# EAGLE board Sprite-Panelized (EAGLE 6.1)
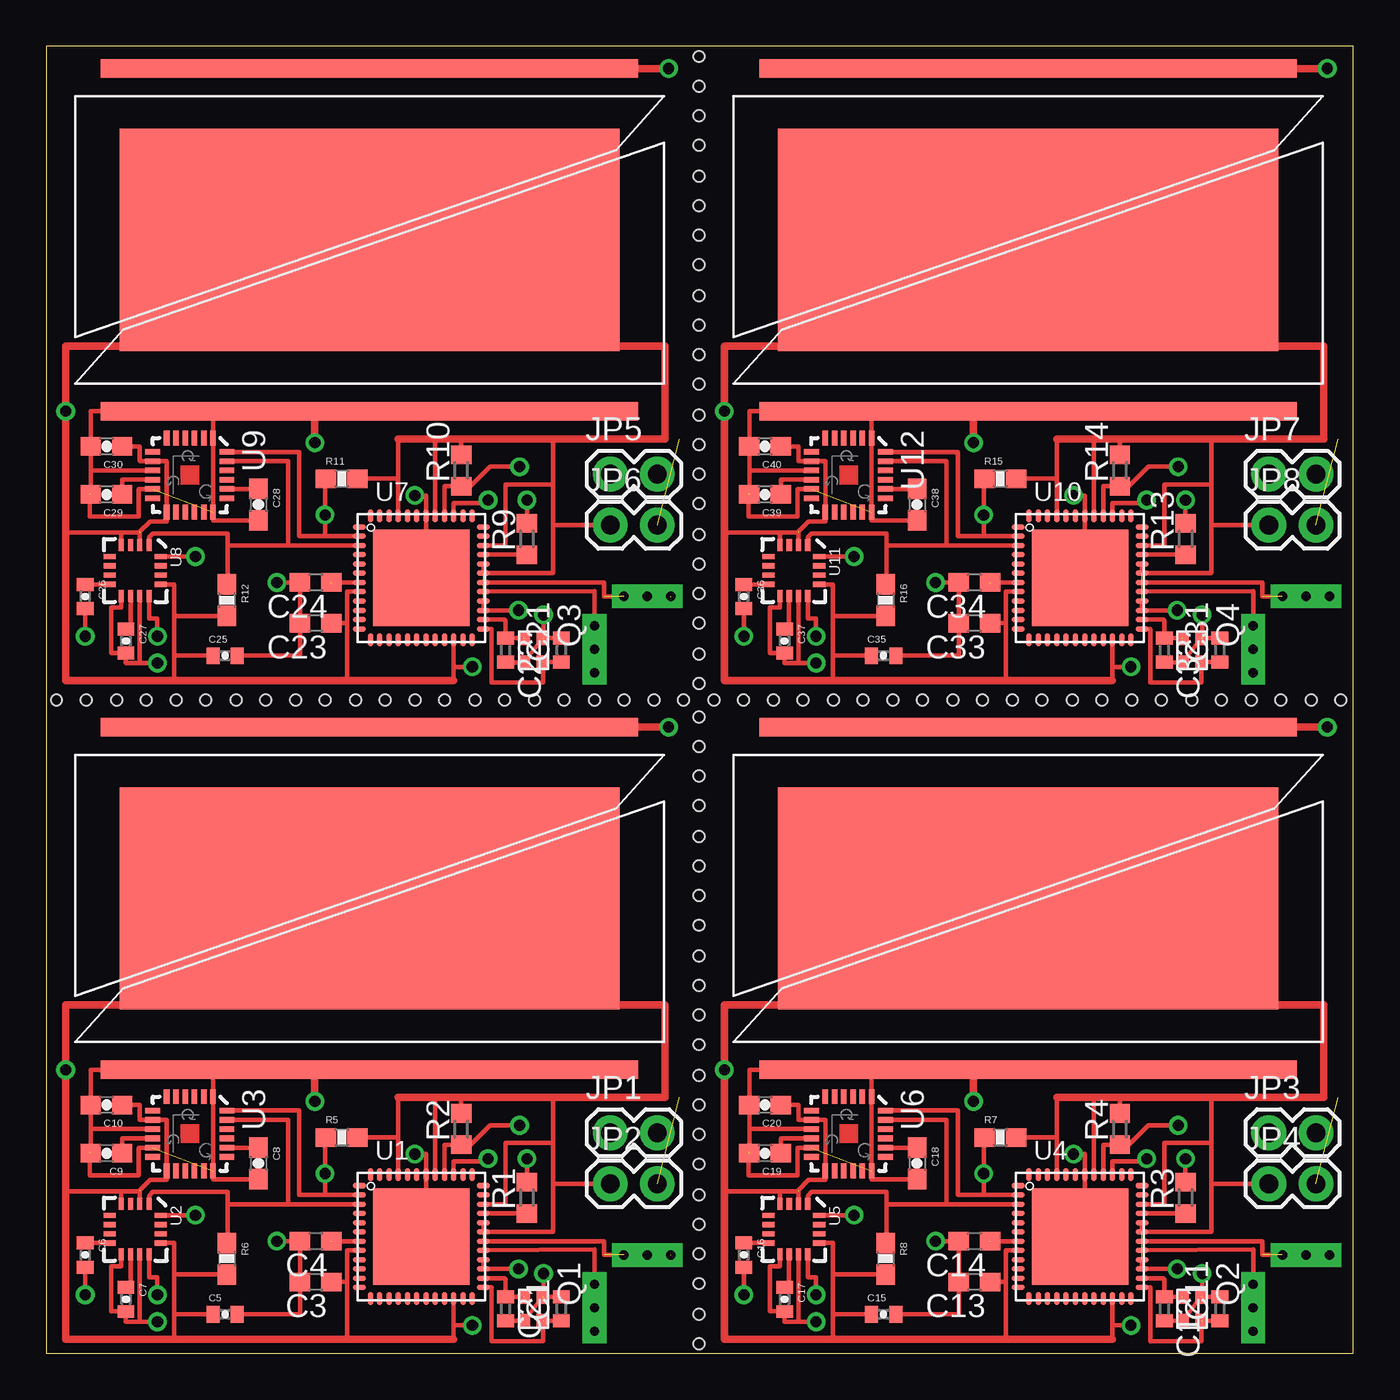
[diagram p0: board, top side]
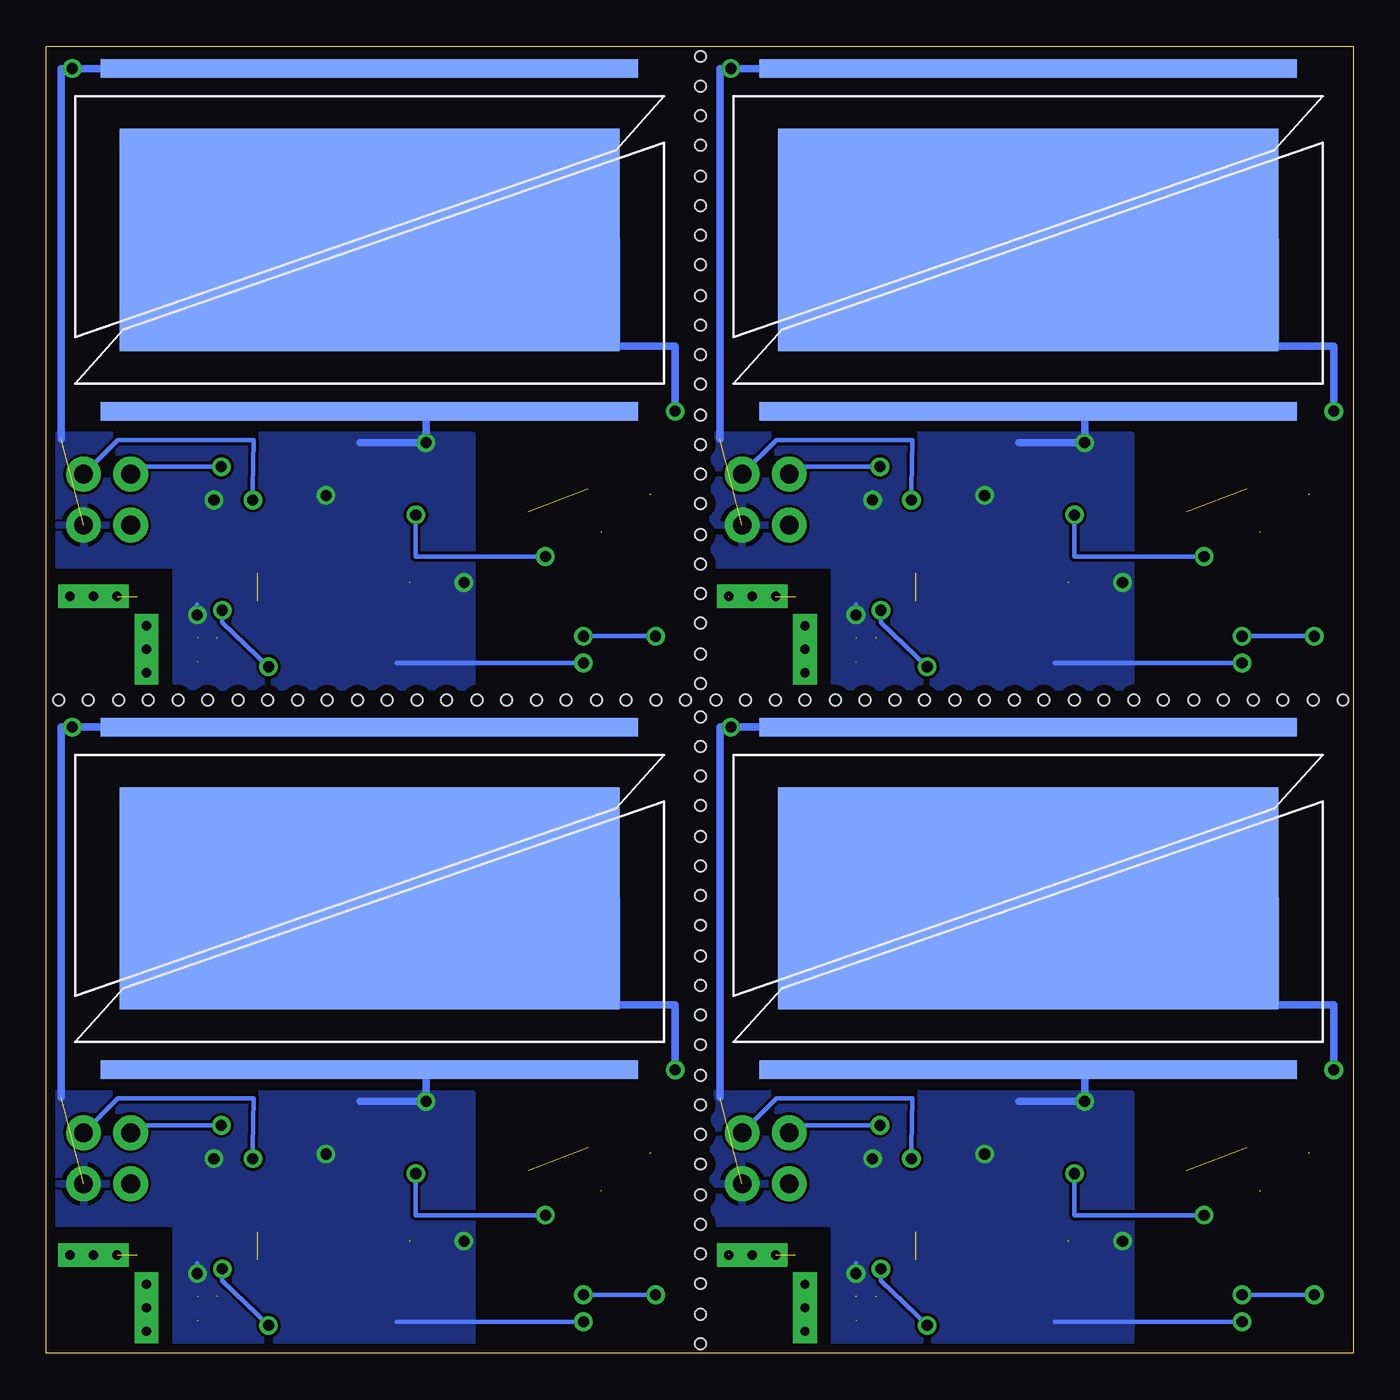
[diagram p1: board, bottom side, seen from below]

Size 70.56 x 70.56 mm. Coordinates in mm from the lower left corner, seen from the top.
Outline: 0,0 70.56,0 70.56,70.56 0,70.56 0,0
Copper layers (1*16): Top 0.0178mm / dielectric 59mil / Bottom 0.0178mm
Design rules: minimum track width 6mil, minimum drill 14mil, track to track 6mil, track to pad 6mil, pad to pad 6mil, via to via 6mil, smd to smd 6mil, copper to edge 20mil, drill to drill 16mil, minimum pad ring 8mil, minimum via ring 8mil, stop-mask expansion 3mil, vias tented up to drill 0mil, thermal gap 10mil
Holes 0.6 mm at 0.55,35.26 2.15,35.26 3.8,35.26 5.4,35.26 7,35.26 8.6,35.26 10.25,35.26 11.85,35.26 13.45,35.26 15.05,35.26 16.7,35.26 18.3,35.26 19.9,35.26 21.5,35.26 23.15,35.26 24.75,35.26 26.35,35.26 27.95,35.26 29.6,35.26 31.2,35.26 32.8,35.26 34.4,35.26 36.05,35.26 37.65,35.26 39.25,35.26 40.85,35.26 42.5,35.26 44.1,35.26 45.7,35.26 47.3,35.26 48.95,35.26 50.55,35.26 52.15,35.26 53.75,35.26 55.4,35.26 57,35.26 58.6,35.26 60.2,35.26 61.85,35.26 63.45,35.26 65.05,35.26 66.65,35.26 68.3,35.26 69.9,35.26 35.25,36.16 35.25,37.76 35.25,39.41 35.25,41.01 35.25,42.61 35.25,44.21 35.25,45.86 35.25,47.46 35.25,49.06 35.25,50.66 35.25,52.31 35.25,53.91 35.25,55.51 35.25,57.11 35.25,58.76 35.25,60.36 35.25,61.96 35.25,63.56 35.25,65.21 35.25,66.81 35.25,68.41 35.25,70.01 35.25,0.51 35.25,2.11 35.25,3.76 35.25,5.36 35.25,6.96 35.25,8.56 35.25,10.21 35.25,11.81 35.25,13.41 35.25,15.01 35.25,16.66 35.25,18.26 35.25,19.86 35.25,21.46 35.25,23.11 35.25,24.71 35.25,26.31 35.25,27.91 35.25,29.56 35.25,31.16 35.25,32.76 35.25,34.36

## Footprints (pad centres in the part's own frame; a part is rotated, then mirrored left to right if it is on the bottom)
C0402 = smd 0.7 x 0.9: 1 -0.65,0; 2 0.65,0
C0603 = smd 1.1 x 1: 1 -0.85,0; 2 0.85,0
0402-CAP = smd 0.7 x 0.9: 1 -0.65,0; 2 0.65,0
0603-CAP = smd 1.1 x 1: 1 -0.85,0; 2 0.85,0
1X02 = drill 1.016 pad 1.88: 1 0,0; 2 2.54,0
ABM11_CERAMIC-SMD-CRYSTAL = smd 0.762 x 0.66: P$1 0.66,0.508; P$2 0.66,-0.508; P$3 -0.66,-0.508; P$4 -0.66,0.508
R0603 = smd 1 x 1.1: 1 -0.85,0; 2 0.85,0
0603-RES = smd 1.1 x 1: 1 -0.85,0; 2 0.85,0
TASC = smd 29 x 1: MINUS1 15.9,17; MINUS2 15.9,-1.5 | smd 27 x 12: PLUS 15.9,7.75
RGZ48 = smd 0.7 x 0.3: 1 -3.35,2.75; 2 -3.35,2.25; 3 -3.35,1.75; 4 -3.35,1.25; 5 -3.35,0.75; 6 -3.35,0.25; 7 -3.35,-0.25; 8 -3.35,-0.75; 9 -3.35,-1.25; 10 -3.35,-1.75; 11 -3.35,-2.25; 12 -3.35,-2.75; 25 3.35,-2.75; 26 3.35,-2.25; 27 3.35,-1.75; 28 3.35,-1.25; 29 3.35,-0.75; 30 3.35,-0.25; 31 3.35,0.25; 32 3.35,0.75; 33 3.35,1.25; 34 3.35,1.75; 35 3.35,2.25; 36 3.35,2.75 | smd 0.3 x 0.7: 13 -2.75,-3.35; 14 -2.25,-3.35; 15 -1.75,-3.35; 16 -1.25,-3.35; 17 -0.75,-3.35; 18 -0.25,-3.35; 19 0.25,-3.35; 20 0.75,-3.35; 21 1.25,-3.35; 22 1.75,-3.35; 23 2.25,-3.35; 24 2.75,-3.35; 37 2.75,3.35; 38 2.25,3.35; 39 1.75,3.35; 40 1.25,3.35; 41 0.75,3.35; 42 0.25,3.35; 43 -0.25,3.35; 44 -0.75,3.35; 45 -1.25,3.35; 46 -1.75,3.35; 47 -2.25,3.35; 48 -2.75,3.35 | smd 5.2 x 5.2: TP 0,0
16LPCC = smd 0.65 x 0.28: 1 -1.37,0.75; 2 -1.37,0.25; 3 -1.37,-0.25; 4 -1.37,-0.75; 9 1.37,-0.75; 10 1.37,-0.25; 11 1.37,0.25; 12 1.37,0.75 | smd 0.28 x 0.65: 5 -0.75,-1.37; 6 -0.25,-1.37; 7 0.25,-1.37; 8 0.75,-1.37; 13 0.75,1.37; 14 0.25,1.37; 15 -0.25,1.37; 16 -0.75,1.37
QFN-24 = smd 0.8 x 0.3: 1 -2,1.25; 2 -2,0.75; 3 -2,0.25; 4 -2,-0.25; 5 -2,-0.75; 6 -2,-1.25; 13 2,-1.25; 14 2,-0.75; 15 2,-0.25; 16 2,0.25; 17 2,0.75; 18 2,1.25 | smd 0.3 x 0.8: 7 -1.25,-2; 8 -0.75,-2; 9 -0.25,-2; 10 0.25,-2; 11 0.75,-2; 12 1.25,-2; 19 1.25,2; 20 0.75,2; 21 0.25,2; 22 -0.25,2; 23 -0.75,2; 24 -1.25,2
ANTENNA = drill 0.5 pad 1.27 square: IN1 1.27,0; IN2 0,0; IN3 -1.27,0

## Placement (x,y rotation side)
C1  27 pF  [C0402]  27.8,2.4 90 top
C2  27 pF  [C0402]  24.8,2.4 270 top
C3  470 nF  [C0603]  14.55,3.85 180 top
C4  470 nF  [C0603]  14.55,6.05 180 top
C5  .1uF  [0402-CAP]  9.65,2.1 0 top
C6  .22uF  [0402-CAP]  2.1,5.3 270 top
C7  4.7uF  [0402-CAP]  4.3,2.9 270 top
C8  2.2nF  [0603-CAP]  11.45,10.25 270 top
C9  0.1uF  [0603-CAP]  3.25,10.8 180 top
C10  10nF  [0603-CAP]  3.25,13.4 180 top
C11  27 pF  [C0402]  63.36,2.4 90 top
C12  27 pF  [C0402]  60.36,2.4 270 top
C13  470 nF  [C0603]  50.11,3.85 180 top
C14  470 nF  [C0603]  50.11,6.05 180 top
C15  .1uF  [0402-CAP]  45.21,2.1 0 top
C16  .22uF  [0402-CAP]  37.66,5.3 270 top
C17  4.7uF  [0402-CAP]  39.86,2.9 270 top
C18  2.2nF  [0603-CAP]  47.01,10.25 270 top
C19  0.1uF  [0603-CAP]  38.81,10.8 180 top
C20  10nF  [0603-CAP]  38.81,13.4 180 top
C21  27 pF  [C0402]  27.8,37.96 90 top
C22  27 pF  [C0402]  24.8,37.96 270 top
C23  470 nF  [C0603]  14.55,39.41 180 top
C24  470 nF  [C0603]  14.55,41.61 180 top
C25  .1uF  [0402-CAP]  9.65,37.66 0 top
C26  .22uF  [0402-CAP]  2.1,40.86 270 top
C27  4.7uF  [0402-CAP]  4.3,38.46 270 top
C28  2.2nF  [0603-CAP]  11.45,45.81 270 top
C29  0.1uF  [0603-CAP]  3.25,46.36 180 top
C30  10nF  [0603-CAP]  3.25,48.96 180 top
C31  27 pF  [C0402]  63.36,37.96 90 top
C32  27 pF  [C0402]  60.36,37.96 270 top
C33  470 nF  [C0603]  50.11,39.41 180 top
C34  470 nF  [C0603]  50.11,41.61 180 top
C35  .1uF  [0402-CAP]  45.21,37.66 0 top
C36  .22uF  [0402-CAP]  37.66,40.86 270 top
C37  4.7uF  [0402-CAP]  39.86,38.46 270 top
C38  2.2nF  [0603-CAP]  47.01,45.81 270 top
C39  0.1uF  [0603-CAP]  38.81,46.36 180 top
C40  10nF  [0603-CAP]  38.81,48.96 180 top
JP1  [1X02]  30.45,11.9 0 top
JP2  [1X02]  30.45,9.15 0 top
JP3  [1X02]  66.01,11.9 0 top
JP4  [1X02]  66.01,9.15 0 top
JP5  [1X02]  30.45,47.46 0 top
JP6  [1X02]  30.45,44.71 0 top
JP7  [1X02]  66.01,47.46 0 top
JP8  [1X02]  66.01,44.71 0 top
Q1  ABM11  [ABM11_CERAMIC-SMD-CRYSTAL]  26.3,2.4 270 top
Q2  ABM11  [ABM11_CERAMIC-SMD-CRYSTAL]  61.86,2.4 270 top
Q3  ABM11  [ABM11_CERAMIC-SMD-CRYSTAL]  26.3,37.96 270 top
Q4  ABM11  [ABM11_CERAMIC-SMD-CRYSTAL]  61.86,37.96 270 top
R1  56 K  [R0603]  25.95,8.4 90 top
R2  47 K  [R0603]  22.4,12.1 90 top
R3  56 K  [R0603]  61.51,8.4 90 top
R4  47 K  [R0603]  57.96,12.1 90 top
R5  DNP  [0603-RES]  15.95,11.65 0 top
R6  DNP  [0603-RES]  9.75,5.1 270 top
R7  DNP  [0603-RES]  51.51,11.65 0 top
R8  DNP  [0603-RES]  45.31,5.1 270 top
R9  56 K  [R0603]  25.95,43.96 90 top
R10  47 K  [R0603]  22.4,47.66 90 top
R11  DNP  [0603-RES]  15.95,47.21 0 top
R12  DNP  [0603-RES]  9.75,40.66 270 top
R13  56 K  [R0603]  61.51,43.96 90 top
R14  47 K  [R0603]  57.96,47.66 90 top
R15  DNP  [0603-RES]  51.51,47.21 0 top
R16  DNP  [0603-RES]  45.31,40.66 270 top
S1  TASC  [TASC]  1.55,16.8 0 top
S2  TASC  [TASC]  33.45,16.8 0 bottom
S3  TASC  [TASC]  37.11,16.8 0 top
S4  TASC  [TASC]  69.01,16.8 0 bottom
S5  TASC  [TASC]  1.55,52.36 0 top
S6  TASC  [TASC]  33.45,52.36 0 bottom
S7  TASC  [TASC]  37.11,52.36 0 top
S8  TASC  [TASC]  69.01,52.36 0 bottom
U1  CC430F5137  [RGZ48]  20.25,6.3 0 top
U2  HMC5883LSMD  [16LPCC]  4.8,6.7 270 top
U3  ITG-3200  [QFN-24]  7.75,11.85 270 top
U4  CC430F5137  [RGZ48]  55.81,6.3 0 top
U5  HMC5883LSMD  [16LPCC]  40.36,6.7 270 top
U6  ITG-3200  [QFN-24]  43.31,11.85 270 top
U7  CC430F5137  [RGZ48]  20.25,41.86 0 top
U8  HMC5883LSMD  [16LPCC]  4.8,42.26 270 top
U9  ITG-3200  [QFN-24]  7.75,47.41 270 top
U10  CC430F5137  [RGZ48]  55.81,41.86 0 top
U11  HMC5883LSMD  [16LPCC]  40.36,42.26 270 top
U12  ITG-3200  [QFN-24]  43.31,47.41 270 top
U$1  ANTENNA  [ANTENNA]  32.45,5.3 180 top
U$2  ANTENNA  [ANTENNA]  29.6,2.45 90 top
U$3  ANTENNA  [ANTENNA]  68.01,5.3 180 top
U$4  ANTENNA  [ANTENNA]  65.16,2.45 90 top
U$5  ANTENNA  [ANTENNA]  32.45,40.86 180 top
U$6  ANTENNA  [ANTENNA]  29.6,38.01 90 top
U$7  ANTENNA  [ANTENNA]  68.01,40.86 180 top
U$8  ANTENNA  [ANTENNA]  65.16,38.01 90 top

## Library data of the parts
C1-C4 C11-C14 C21-C24 C31-C34 R1-R4 R9 R10 R13 R14 = rcl
C5-C10 C15-C20 C25-C30 C35-C40 JP1-JP8 R5-R8 R11 R12 R15 R16 U2 U3 U5 U6 U8 U9 U11 U12 = SparkFun
Q1-Q4 = ABM11_JAA
S1-S8 = TASC
U1 U4 U7 U10 = TI_MSP430_v16
U$1-U$8 = SpriteAntenna

## Nets
GND: C1.2 C2.2 C3.2 C4.2 C5.2 C7.2 C8.2 C9.2 C10.2 JP2.2 Q1.P$2 Q1.P$4 R1.2 S1.MINUS1 S1.MINUS2 S2.MINUS1 S2.MINUS2 U1.42 U1.TP U2.9 U2.11 U3.1 U3.9 U3.11 U3.18
GND1: C11.2 C12.2 C13.2 C14.2 C15.2 C17.2 C18.2 C19.2 C20.2 JP4.2 Q2.P$2 Q2.P$4 R3.2 S3.MINUS1 S3.MINUS2 S4.MINUS1 S4.MINUS2 U4.42 U4.TP U5.9 U5.11 U6.1 U6.9 U6.11 U6.18
GND2: C21.2 C22.2 C23.2 C24.2 C25.2 C27.2 C28.2 C29.2 C30.2 JP6.2 Q3.P$2 Q3.P$4 R9.2 S5.MINUS1 S5.MINUS2 S6.MINUS1 S6.MINUS2 U7.42 U7.TP U8.9 U8.11 U9.1 U9.9 U9.11 U9.18
GND3: C31.2 C32.2 C33.2 C34.2 C35.2 C37.2 C38.2 C39.2 C40.2 JP8.2 Q4.P$2 Q4.P$4 R13.2 S7.MINUS1 S7.MINUS2 S8.MINUS1 S8.MINUS2 U10.42 U10.TP U11.9 U11.11 U12.1 U12.9 U12.11 U12.18
N$1: C2.1 Q1.P$3 U1.26
N$2: C1.1 Q1.P$1 U1.25
N$3: R1.1 U1.33
N$4: C4.1 U1.7
N$5: C6.1 U2.8
N$6: C6.2 U2.12
N$7: C7.1 U2.10
N$8: C8.1 U3.20
N$9: C9.1 U3.10
N$10: C12.1 Q2.P$3 U4.26
N$11: C11.1 Q2.P$1 U4.25
N$12: R3.1 U4.33
N$13: C14.1 U4.7
N$14: C16.1 U5.8
N$15: C16.2 U5.12
N$16: C17.1 U5.10
N$17: C18.1 U6.20
N$18: C19.1 U6.10
N$19: C22.1 Q3.P$3 U7.26
N$20: C21.1 Q3.P$1 U7.25
N$21: R9.1 U7.33
N$22: C24.1 U7.7
N$23: C26.1 U8.8
N$24: C26.2 U8.12
N$25: C27.1 U8.10
N$26: C28.1 U9.20
N$27: C29.1 U9.10
N$28: C32.1 Q4.P$3 U10.26
N$29: C31.1 Q4.P$1 U10.25
N$30: R13.1 U10.33
N$31: C34.1 U10.7
N$32: C36.1 U11.8
N$33: C36.2 U11.12
N$34: C37.1 U11.10
N$35: C38.1 U12.20
N$36: C39.1 U12.10
RFN: U1.30 U$1.IN1 U$1.IN2 U$1.IN3
RFN1: U4.30 U$3.IN1 U$3.IN2 U$3.IN3
RFN2: U7.30 U$5.IN1 U$5.IN2 U$5.IN3
RFN3: U10.30 U$7.IN1 U$7.IN2 U$7.IN3
RFP: U1.29 U$2.IN1 U$2.IN2 U$2.IN3
RFP1: U4.29 U$4.IN1 U$4.IN2 U$4.IN3
RFP2: U7.29 U$6.IN1 U$6.IN2 U$6.IN3
RFP3: U10.29 U$8.IN1 U$8.IN2 U$8.IN3
RST: JP1.1 R2.1 U1.40
RST1: JP3.1 R4.1 U4.40
RST2: JP5.1 R10.1 U7.40
RST3: JP7.1 R14.1 U10.40
SCL: R6.1 U1.3 U2.1 U3.23
SCL1: R8.1 U4.3 U5.1 U6.23
SCL2: R12.1 U7.3 U8.1 U9.23
SCL3: R16.1 U10.3 U11.1 U12.23
SDA: R5.1 U1.2 U2.16 U3.24
SDA1: R7.1 U4.2 U5.16 U6.24
SDA2: R11.1 U7.2 U8.16 U9.24
SDA3: R15.1 U10.2 U11.16 U12.24
TEST: JP1.2 U1.39
TEST1: JP3.2 U4.39
TEST2: JP5.2 U7.39
TEST3: JP7.2 U10.39
VCC: C3.1 C5.1 C10.1 JP2.1 R2.2 R5.2 R6.2 S1.PLUS S2.PLUS U1.8 U1.22 U1.27 U1.28 U1.31 U1.32 U1.34 U1.41 U1.45 U2.2 U2.4 U2.13 U3.8 U3.13
VCC1: C13.1 C15.1 C20.1 JP4.1 R4.2 R7.2 R8.2 S3.PLUS S4.PLUS U4.8 U4.22 U4.27 U4.28 U4.31 U4.32 U4.34 U4.41 U4.45 U5.2 U5.4 U5.13 U6.8 U6.13
VCC2: C23.1 C25.1 C30.1 JP6.1 R10.2 R11.2 R12.2 S5.PLUS S6.PLUS U7.8 U7.22 U7.27 U7.28 U7.31 U7.32 U7.34 U7.41 U7.45 U8.2 U8.4 U8.13 U9.8 U9.13
VCC3: C33.1 C35.1 C40.1 JP8.1 R14.2 R15.2 R16.2 S7.PLUS S8.PLUS U10.8 U10.22 U10.27 U10.28 U10.31 U10.32 U10.34 U10.41 U10.45 U11.2 U11.4 U11.13 U12.8 U12.13

## Tracks (layer width: path | path; a pad name or v marks a point on that pad's centre or on a via)
GND  (via drill 0.6)  (4 unrouted)
  Top 0.254: C2.2 25.05,1.74 Q1.P$2 Q1.P$4 C1.2 | 26.85,3.06 v26.85,4.3 | R1.2 v25.95,10.5 | U1.42 20.5,6.3 U1.TP | v12.45,6.05 C4.2 C3.2 13.7,2.1 C5.2 | U1.42 20.5,9.75 | U1.42 20.5,10.75 v19.9,10.75 | C7.2 4.3,1.7 5.05,1.7 | 5.05,1.7 v6,1.7 | U2.9 4.05,4.7 3.5,4.7 3.5,2.25 C7.2 | C7.2 4.55,2.3 | U2.11 5.05,1.7 | U3.9 2.4,12.1 | 4.3,15.25 4.3,15.3 2.4,15.3 C10.2 2.4,12.1 | 2.4,12.1 C9.2 | 14.5,15.35 9,15.3 U3.1 U3.18 9,9.4 C8.2 | U3.11 5,11.1 5,9.6 2.35,9.6 2.35,10.85
  Top 0.406: S1.MINUS1 v33.6,33.8 | S1.MINUS2 14.5,15.35 v14.5,13.6
  Bottom 0.254: v26.85,4.3 26.85,4.85 | v19.9,10.75 19.85,10.95 19.85,11.1 | v6,1.7 16.1,1.7
  Bottom 0.406: 34.2,13.8 34.2,33.8 v33.6,33.8 S2.MINUS1 | 18.05,13.6 v14.5,13.6 14.5,15.3 S2.MINUS2
  pour Bottom: 12,14 12,0 28,0 28,7 35,7 35,14
GND1  (via drill 0.6)  (4 unrouted)
  Top 0.254: C12.2 60.61,1.74 Q2.P$2 Q2.P$4 C11.2 | 62.41,3.06 v62.41,4.3 | R3.2 v61.51,10.5 | U4.42 56.06,6.3 U4.TP | v48.01,6.05 C14.2 C13.2 49.26,2.1 C15.2 | U4.42 56.06,9.75 | U4.42 56.06,10.75 v55.46,10.75 | C17.2 39.86,1.7 40.61,1.7 | 40.61,1.7 v41.56,1.7 | U5.9 39.61,4.7 39.06,4.7 39.06,2.25 C17.2 | C17.2 40.11,2.3 | U5.11 40.61,1.7 | U6.9 37.96,12.1 | 39.86,15.25 39.86,15.3 37.96,15.3 C20.2 37.96,12.1 | 37.96,12.1 C19.2 | 50.06,15.35 44.56,15.3 U6.1 U6.18 44.56,9.4 C18.2 | U6.11 40.56,11.1 40.56,9.6 37.91,9.6 37.91,10.85
  Top 0.406: S3.MINUS1 v69.16,33.8 | S3.MINUS2 50.06,15.35 v50.06,13.6
  Bottom 0.254: v62.41,4.3 62.41,4.85 | v55.46,10.75 55.41,10.95 55.41,11.1 | v41.56,1.7 51.66,1.7
  Bottom 0.406: 69.76,13.8 69.76,33.8 v69.16,33.8 S4.MINUS1 | 53.61,13.6 v50.06,13.6 50.06,15.3 S4.MINUS2
  pour Bottom: 47.56,14 47.56,0 63.56,0 63.56,7 70.56,7 70.56,14
GND2  (via drill 0.6)  (4 unrouted)
  Top 0.254: C22.2 25.05,37.3 Q3.P$2 Q3.P$4 C21.2 | 26.85,38.62 v26.85,39.86 | R9.2 v25.95,46.06 | U7.42 20.5,41.86 U7.TP | v12.45,41.61 C24.2 C23.2 13.7,37.66 C25.2 | U7.42 20.5,45.31 | U7.42 20.5,46.31 v19.9,46.31 | C27.2 4.3,37.26 5.05,37.26 | 5.05,37.26 v6,37.26 | U8.9 4.05,40.26 3.5,40.26 3.5,37.81 C27.2 | C27.2 4.55,37.86 | U8.11 5.05,37.26 | U9.9 2.4,47.66 | 4.3,50.81 4.3,50.86 2.4,50.86 C30.2 2.4,47.66 | 2.4,47.66 C29.2 | 14.5,50.91 9,50.86 U9.1 U9.18 9,44.96 C28.2 | U9.11 5,46.66 5,45.16 2.35,45.16 2.35,46.41
  Top 0.406: S5.MINUS1 v33.6,69.36 | S5.MINUS2 14.5,50.91 v14.5,49.16
  Bottom 0.254: v26.85,39.86 26.85,40.41 | v19.9,46.31 19.85,46.51 19.85,46.66 | v6,37.26 16.1,37.26
  Bottom 0.406: 34.2,49.36 34.2,69.36 v33.6,69.36 S6.MINUS1 | 18.05,49.16 v14.5,49.16 14.5,50.86 S6.MINUS2
  pour Bottom: 12,49.56 12,35.56 28,35.56 28,42.56 35,42.56 35,49.56
GND3  (via drill 0.6)  (4 unrouted)
  Top 0.254: C32.2 60.61,37.3 Q4.P$2 Q4.P$4 C31.2 | 62.41,38.62 v62.41,39.86 | R13.2 v61.51,46.06 | U10.42 56.06,41.86 U10.TP | v48.01,41.61 C34.2 C33.2 49.26,37.66 C35.2 | U10.42 56.06,45.31 | U10.42 56.06,46.31 v55.46,46.31 | C37.2 39.86,37.26 40.61,37.26 | 40.61,37.26 v41.56,37.26 | U11.9 39.61,40.26 39.06,40.26 39.06,37.81 C37.2 | C37.2 40.11,37.86 | U11.11 40.61,37.26 | U12.9 37.96,47.66 | 39.86,50.81 39.86,50.86 37.96,50.86 C40.2 37.96,47.66 | 37.96,47.66 C39.2 | 50.06,50.91 44.56,50.86 U12.1 U12.18 44.56,44.96 C38.2 | U12.11 40.56,46.66 40.56,45.16 37.91,45.16 37.91,46.41
  Top 0.406: S7.MINUS1 v69.16,69.36 | S7.MINUS2 50.06,50.91 v50.06,49.16
  Bottom 0.254: v62.41,39.86 62.41,40.41 | v55.46,46.31 55.41,46.51 55.41,46.66 | v41.56,37.26 51.66,37.26
  Bottom 0.406: 69.76,49.36 69.76,69.36 v69.16,69.36 S8.MINUS1 | 53.61,49.16 v50.06,49.16 50.06,50.86 S8.MINUS2
  pour Bottom: 47.56,49.56 47.56,35.56 63.56,35.56 63.56,42.56 70.56,42.56 70.56,49.56
N$1  (1 unrouted)
  Top 0.254: U1.26 24.75,4.05 24.8,4 C2.1 25.75,3.05
N$2  (1 unrouted)
  Top 0.254: U1.25 24.05,3.55 24.05,0.65 26.81,0.65 Q1.P$1 | C1.1 26.85,1.75
N$3
  Top 0.254: R1.1 U1.33
N$4  (1 unrouted)
  Top 0.254: U1.7 15.35,6.05 15.35,6.1
N$5
  Top 0.254: U2.8 C6.1 2.1,6
N$6  (via drill 0.6)
  Top 0.254: C6.2 v2.1,3.15 | U2.12 5.55,4.1 6,4.1 v6,3.15
  Bottom 0.254: v2.1,3.15 v6,3.15
N$7
  Top 0.254: C7.1 4.55,3.55 U2.10
N$8
  Top 0.254: U3.20 C8.1 11.65,11.25
N$9
  Top 0.254: U3.10 4.1,11.6 C9.1
N$10  (1 unrouted)
  Top 0.254: U4.26 60.31,4.05 60.36,4 C12.1 61.31,3.05
N$11  (1 unrouted)
  Top 0.254: U4.25 59.61,3.55 59.61,0.65 62.37,0.65 Q2.P$1 | C11.1 62.41,1.75
N$12
  Top 0.254: R3.1 U4.33
N$13  (1 unrouted)
  Top 0.254: U4.7 50.91,6.05 50.91,6.1
N$14
  Top 0.254: U5.8 C16.1 37.66,6
N$15  (via drill 0.6)
  Top 0.254: C16.2 v37.66,3.15 | U5.12 41.11,4.1 41.56,4.1 v41.56,3.15
  Bottom 0.254: v37.66,3.15 v41.56,3.15
N$16
  Top 0.254: C17.1 40.11,3.55 U5.10
N$17
  Top 0.254: U6.20 C18.1 47.21,11.25
N$18
  Top 0.254: U6.10 39.66,11.6 C19.1
N$19  (1 unrouted)
  Top 0.254: U7.26 24.75,39.61 24.8,39.56 C22.1 25.75,38.61
N$20  (1 unrouted)
  Top 0.254: U7.25 24.05,39.11 24.05,36.21 26.81,36.21 Q3.P$1 | C21.1 26.85,37.31
N$21
  Top 0.254: R9.1 U7.33
N$22  (1 unrouted)
  Top 0.254: U7.7 15.35,41.61 15.35,41.66
N$23
  Top 0.254: U8.8 C26.1 2.1,41.56
N$24  (via drill 0.6)
  Top 0.254: C26.2 v2.1,38.71 | U8.12 5.55,39.66 6,39.66 v6,38.71
  Bottom 0.254: v2.1,38.71 v6,38.71
N$25
  Top 0.254: C27.1 4.55,39.11 U8.10
N$26
  Top 0.254: U9.20 C28.1 11.65,46.81
N$27
  Top 0.254: U9.10 4.1,47.16 C29.1
N$28  (1 unrouted)
  Top 0.254: U10.26 60.31,39.61 60.36,39.56 C32.1 61.31,38.61
N$29  (1 unrouted)
  Top 0.254: U10.25 59.61,39.11 59.61,36.21 62.37,36.21 Q4.P$1 | C31.1 62.41,37.31
N$30
  Top 0.254: R13.1 U10.33
N$31  (1 unrouted)
  Top 0.254: U10.7 50.91,41.61 50.91,41.66
N$32
  Top 0.254: U11.8 C36.1 37.66,41.56
N$33  (via drill 0.6)
  Top 0.254: C36.2 v37.66,38.71 | U11.12 41.11,39.66 41.56,39.66 v41.56,38.71
  Bottom 0.254: v37.66,38.71 v41.56,38.71
N$34
  Top 0.254: C37.1 40.11,39.11 U11.10
N$35
  Top 0.254: U12.20 C38.1 47.21,46.81
N$36
  Top 0.254: U12.10 39.66,47.16 C39.1
RFN  (2 unrouted)
  Top 0.254: U1.30 30.1,6.05 30.1,5.3 U$1.IN2 33.7,5.3
RFN1  (2 unrouted)
  Top 0.254: U4.30 65.66,6.05 65.66,5.3 U$3.IN2 69.26,5.3
RFN2  (2 unrouted)
  Top 0.254: U7.30 30.1,41.61 30.1,40.86 U$5.IN2 33.7,40.86
RFN3  (2 unrouted)
  Top 0.254: U10.30 65.66,41.61 65.66,40.86 U$7.IN2 69.26,40.86
RFP
  Top 0.254: U1.29 29.6,5.6 U$2.IN1 U$2.IN2 U$2.IN3
RFP1
  Top 0.254: U4.29 65.16,5.6 U$4.IN1 U$4.IN2 U$4.IN3
RFP2
  Top 0.254: U7.29 29.6,41.16 U$6.IN1 U$6.IN2 U$6.IN3
RFP3
  Top 0.254: U10.29 65.16,41.16 U$8.IN1 U$8.IN2 U$8.IN3
RST  (via drill 0.6)
  Top 0.254: U1.40 21.5,11.25 R2.1 22.9,11.25 23.95,12.3 v25.55,12.3
  Bottom 0.254: v25.55,12.3 30.05,12.3 JP1.1
RST1  (via drill 0.6)
  Top 0.254: U4.40 57.06,11.25 R4.1 58.46,11.25 59.51,12.3 v61.11,12.3
  Bottom 0.254: v61.11,12.3 65.61,12.3 JP3.1
RST2  (via drill 0.6)
  Top 0.254: U7.40 21.5,46.81 R10.1 22.9,46.81 23.95,47.86 v25.55,47.86
  Bottom 0.254: v25.55,47.86 30.05,47.86 JP5.1
RST3  (via drill 0.6)
  Top 0.254: U10.40 57.06,46.81 R14.1 58.46,46.81 59.51,47.86 v61.11,47.86
  Bottom 0.254: v61.11,47.86 65.61,47.86 JP7.1
SCL
  Top 0.254: 9.8,8.05 9.8,8.7 5.75,8.7 5.55,8.5 U2.1 | 9.8,8.05 13.05,8.05 | 13.05,8.05 U1.3 | U3.23 13.05,12.6 13.05,8.05 | R6.1 9.8,5.95 9.8,8.05
SCL1
  Top 0.254: 45.36,8.05 45.36,8.7 41.31,8.7 41.11,8.5 U5.1 | 45.36,8.05 48.61,8.05 | 48.61,8.05 U4.3 | U6.23 48.61,12.6 48.61,8.05 | R8.1 45.36,5.95 45.36,8.05
SCL2
  Top 0.254: 9.8,43.61 9.8,44.26 5.75,44.26 5.55,44.06 U8.1 | 9.8,43.61 13.05,43.61 | 13.05,43.61 U7.3 | U9.23 13.05,48.16 13.05,43.61 | R12.1 9.8,41.51 9.8,43.61
SCL3
  Top 0.254: 45.36,43.61 45.36,44.26 41.31,44.26 41.11,44.06 U11.1 | 45.36,43.61 48.61,43.61 | 48.61,43.61 U10.3 | U12.23 48.61,48.16 48.61,43.61 | R16.1 45.36,41.51 45.36,43.61
SDA  (via drill 0.6)
  Top 0.254: U3.24 13.65,13.1 13.65,8.55 15.05,8.55 | 15.05,8.55 U1.2 | U2.16 v8.05,7.45 | 15.05,8.55 v15.05,9.7 15.05,11.65 R5.1
  Bottom 0.254: v8.05,7.45 15.05,7.45 v15.05,9.7
SDA1  (via drill 0.6)
  Top 0.254: U6.24 49.21,13.1 49.21,8.55 50.61,8.55 | 50.61,8.55 U4.2 | U5.16 v43.61,7.45 | 50.61,8.55 v50.61,9.7 50.61,11.65 R7.1
  Bottom 0.254: v43.61,7.45 50.61,7.45 v50.61,9.7
SDA2  (via drill 0.6)
  Top 0.254: U9.24 13.65,48.66 13.65,44.11 15.05,44.11 | 15.05,44.11 U7.2 | U8.16 v8.05,43.01 | 15.05,44.11 v15.05,45.26 15.05,47.21 R11.1
  Bottom 0.254: v8.05,43.01 15.05,43.01 v15.05,45.26
SDA3  (via drill 0.6)
  Top 0.254: U12.24 49.21,48.66 49.21,44.11 50.61,44.11 | 50.61,44.11 U10.2 | U11.16 v43.61,43.01 | 50.61,44.11 v50.61,45.26 50.61,47.21 R15.1
  Bottom 0.254: v43.61,43.01 50.61,43.01 v50.61,45.26
TEST  (via drill 0.6)
  Top 0.254: U1.39 22,10.35 23.65,10.35 v23.85,10.5
  Bottom 0.254: v23.85,10.5 23.85,11.15 23.8,13.75 31.14,13.75 JP1.2
TEST1  (via drill 0.6)
  Top 0.254: U4.39 57.56,10.35 59.21,10.35 v59.41,10.5
  Bottom 0.254: v59.41,10.5 59.41,11.15 59.36,13.75 66.7,13.75 JP3.2
TEST2  (via drill 0.6)
  Top 0.254: U7.39 22,45.91 23.65,45.91 v23.85,46.06
  Bottom 0.254: v23.85,46.06 23.85,46.71 23.8,49.31 31.14,49.31 JP5.2
TEST3  (via drill 0.6)
  Top 0.254: U10.39 57.56,45.91 59.21,45.91 v59.41,46.06
  Bottom 0.254: v59.41,46.06 59.41,46.71 59.36,49.31 66.7,49.31 JP7.2
VCC  (via drill 0.6)  (2 unrouted)
  Top 0.254: 16.9,5.6 U1.8 16.25,5.55 16.25,3.85 | 16.25,3.85 C3.1 | U1.45 19,11.65 | 19,11.65 19,13.8 | 22,0.75 22,1.5 | 22,1.5 U1.22 | U1.32 U1.31 27.35,6.55 27.35,9.15 | 27.35,9.15 27.35,11.3 | 27.35,11.3 27.35,13.8 | v23,1.5 22,1.5 | v25.5,4.55 U1.27 U1.28 | 16.25,3.85 16.25,0.75 | 1.05,6.7 1.05,6.75 | U2.4 4.05,8.75 | 4.05,8.75 5.05,8.75 U2.2 | U2.13 6.9,5.95 6.9,4.25 | 6.9,4.25 6.9,2.1 | 6.9,2.1 6.9,0.75 | 4.05,8.75 1.05,8.75 | JP2.1 27.35,9.15 | C5.1 6.9,2.1 | R6.2 6.9,4.25 | R5.2 19,11.65 | U1.41 21,13.8 | R2.2 22.4,13.8 | U1.34 24.8,8.05 24.8,11.35 27.3,11.35 27.35,11.3 | C10.1 5.05,13.4 5.05,12.6 U3.8 6.5,12.6 U3.13 6.5,9.35 5.6,9.35 5.05,8.8
  Top 0.406: S1.PLUS 4.2,24.55 4.2,18.8 1.05,18.8 v1.05,15.3 1.05,8.75 1.05,6.75 1.05,0.75 6.9,0.75 16.25,0.75 22,0.75 | 30.7,18.8 33.4,18.8 33.4,13.8 27.35,13.8 22.4,13.8 21,13.8 19,13.8
  Bottom 0.254: v25.5,4.55 25.5,3.9 v23,1.5
  Bottom 0.406: S2.PLUS 4.2,24.55 4.2,18.8 1.05,18.8 v1.05,15.3
VCC1  (via drill 0.6)  (2 unrouted)
  Top 0.254: 52.46,5.6 U4.8 51.81,5.55 51.81,3.85 | 51.81,3.85 C13.1 | U4.45 54.56,11.65 | 54.56,11.65 54.56,13.8 | 57.56,0.75 57.56,1.5 | 57.56,1.5 U4.22 | U4.32 U4.31 62.91,6.55 62.91,9.15 | 62.91,9.15 62.91,11.3 | 62.91,11.3 62.91,13.8 | v58.56,1.5 57.56,1.5 | v61.06,4.55 U4.27 U4.28 | 51.81,3.85 51.81,0.75 | 36.61,6.7 36.61,6.75 | U5.4 39.61,8.75 | 39.61,8.75 40.61,8.75 U5.2 | U5.13 42.46,5.95 42.46,4.25 | 42.46,4.25 42.46,2.1 | 42.46,2.1 42.46,0.75 | 39.61,8.75 36.61,8.75 | JP4.1 62.91,9.15 | C15.1 42.46,2.1 | R8.2 42.46,4.25 | R7.2 54.56,11.65 | U4.41 56.56,13.8 | R4.2 57.96,13.8 | U4.34 60.36,8.05 60.36,11.35 62.86,11.35 62.91,11.3 | C20.1 40.61,13.4 40.61,12.6 U6.8 42.06,12.6 U6.13 42.06,9.35 41.16,9.35 40.61,8.8
  Top 0.406: S3.PLUS 39.76,24.55 39.76,18.8 36.61,18.8 v36.61,15.3 36.61,8.75 36.61,6.75 36.61,0.75 42.46,0.75 51.81,0.75 57.56,0.75 | 66.26,18.8 68.96,18.8 68.96,13.8 62.91,13.8 57.96,13.8 56.56,13.8 54.56,13.8
  Bottom 0.254: v61.06,4.55 61.06,3.9 v58.56,1.5
  Bottom 0.406: S4.PLUS 39.76,24.55 39.76,18.8 36.61,18.8 v36.61,15.3
VCC2  (via drill 0.6)  (2 unrouted)
  Top 0.254: 16.9,41.16 U7.8 16.25,41.11 16.25,39.41 | 16.25,39.41 C23.1 | U7.45 19,47.21 | 19,47.21 19,49.36 | 22,36.31 22,37.06 | 22,37.06 U7.22 | U7.32 U7.31 27.35,42.11 27.35,44.71 | 27.35,44.71 27.35,46.86 | 27.35,46.86 27.35,49.36 | v23,37.06 22,37.06 | v25.5,40.11 U7.27 U7.28 | 16.25,39.41 16.25,36.31 | 1.05,42.26 1.05,42.31 | U8.4 4.05,44.31 | 4.05,44.31 5.05,44.31 U8.2 | U8.13 6.9,41.51 6.9,39.81 | 6.9,39.81 6.9,37.66 | 6.9,37.66 6.9,36.31 | 4.05,44.31 1.05,44.31 | JP6.1 27.35,44.71 | C25.1 6.9,37.66 | R12.2 6.9,39.81 | R11.2 19,47.21 | U7.41 21,49.36 | R10.2 22.4,49.36 | U7.34 24.8,43.61 24.8,46.91 27.3,46.91 27.35,46.86 | C30.1 5.05,48.96 5.05,48.16 U9.8 6.5,48.16 U9.13 6.5,44.91 5.6,44.91 5.05,44.36
  Top 0.406: S5.PLUS 4.2,60.11 4.2,54.36 1.05,54.36 v1.05,50.86 1.05,44.31 1.05,42.31 1.05,36.31 6.9,36.31 16.25,36.31 22,36.31 | 30.7,54.36 33.4,54.36 33.4,49.36 27.35,49.36 22.4,49.36 21,49.36 19,49.36
  Bottom 0.254: v25.5,40.11 25.5,39.46 v23,37.06
  Bottom 0.406: S6.PLUS 4.2,60.11 4.2,54.36 1.05,54.36 v1.05,50.86
VCC3  (via drill 0.6)  (2 unrouted)
  Top 0.254: 52.46,41.16 U10.8 51.81,41.11 51.81,39.41 | 51.81,39.41 C33.1 | U10.45 54.56,47.21 | 54.56,47.21 54.56,49.36 | 57.56,36.31 57.56,37.06 | 57.56,37.06 U10.22 | U10.32 U10.31 62.91,42.11 62.91,44.71 | 62.91,44.71 62.91,46.86 | 62.91,46.86 62.91,49.36 | v58.56,37.06 57.56,37.06 | v61.06,40.11 U10.27 U10.28 | 51.81,39.41 51.81,36.31 | 36.61,42.26 36.61,42.31 | U11.4 39.61,44.31 | 39.61,44.31 40.61,44.31 U11.2 | U11.13 42.46,41.51 42.46,39.81 | 42.46,39.81 42.46,37.66 | 42.46,37.66 42.46,36.31 | 39.61,44.31 36.61,44.31 | JP8.1 62.91,44.71 | C35.1 42.46,37.66 | R16.2 42.46,39.81 | R15.2 54.56,47.21 | U10.41 56.56,49.36 | R14.2 57.96,49.36 | U10.34 60.36,43.61 60.36,46.91 62.86,46.91 62.91,46.86 | C40.1 40.61,48.96 40.61,48.16 U12.8 42.06,48.16 U12.13 42.06,44.91 41.16,44.91 40.61,44.36
  Top 0.406: S7.PLUS 39.76,60.11 39.76,54.36 36.61,54.36 v36.61,50.86 36.61,44.31 36.61,42.31 36.61,36.31 42.46,36.31 51.81,36.31 57.56,36.31 | 66.26,54.36 68.96,54.36 68.96,49.36 62.91,49.36 57.96,49.36 56.56,49.36 54.56,49.36
  Bottom 0.254: v61.06,40.11 61.06,39.46 v58.56,37.06
  Bottom 0.406: S8.PLUS 39.76,60.11 39.76,54.36 36.61,54.36 v36.61,50.86